# EAGLE board patch (EAGLE 7.2.0)
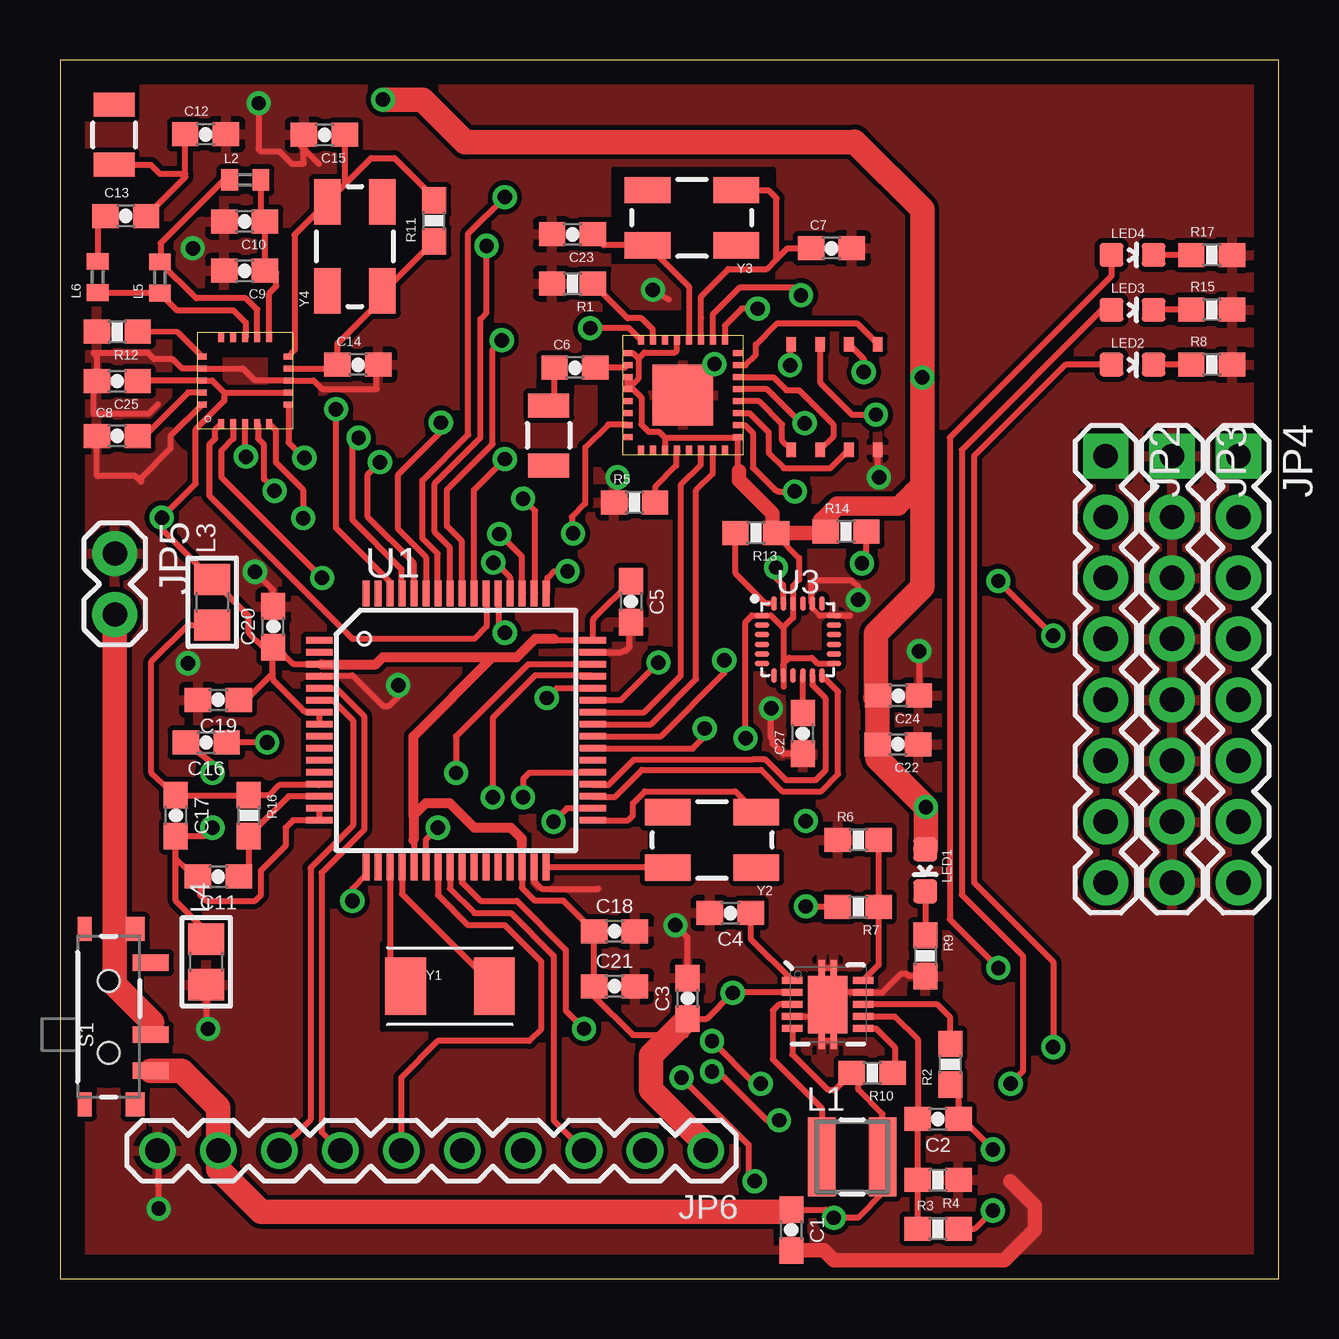
[diagram p0: board, top side]
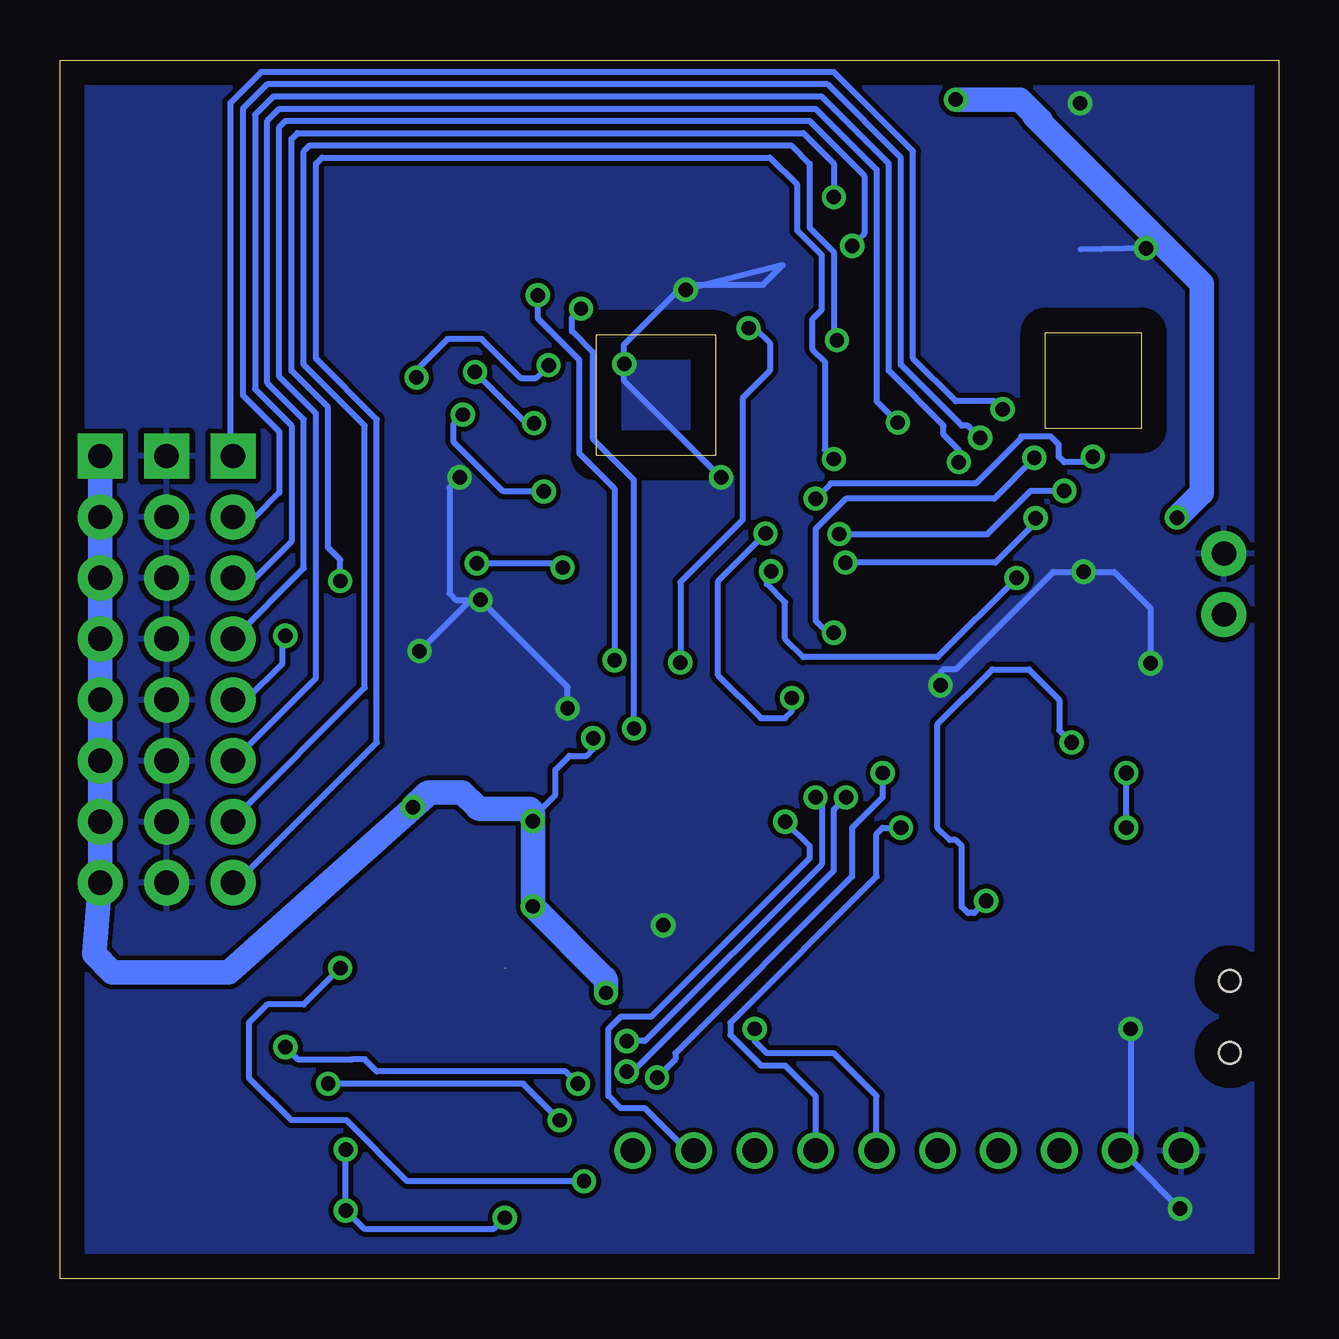
[diagram p1: board, bottom side, seen from below]

Size 50.8 x 50.8 mm. Coordinates in mm from the lower left corner, seen from the top.
Outline: 0,0 50.8,0 50.8,50.8 0,50.8 0,0
Copper layers (1*16): Top 0.035mm / dielectric 1.5mm / Bottom 0.035mm
Design rules "default": minimum track width 10mil, minimum drill 24mil, track to track 8mil, track to pad 8mil, pad to pad 8mil, via to via 8mil, smd to smd 8mil, copper to edge 40mil, drill to drill 8mil, minimum pad ring 10mil, minimum via ring 8mil, stop-mask expansion 4mil, vias tented up to drill 0mil, thermal gap 10mil
Net classes: 1 USB: width 0.254 mm, drill 0.33 mm, clearance 0.159 mm; 2 Top GND Pour: clearance 0.762 mm to class 1
tRestrict: area 13.5,10.4 to 19.1,14; area 31.2,10.2 to 32.8,12.7; area 24.6,16.8 to 29.7,20.1; area 23.1,42.4 to 29.7,46.2

## Footprints (pad centres in the part's own frame; a part is rotated, then mirrored left to right if it is on the bottom)
0603-CAP = smd 1.1 x 1: 1 -0.85,0; 2 0.85,0
1X08 = drill 1.016 pad 1.88 square: 1 0,0 | drill 1.016 pad 1.88: 2 2.54,0; 3 5.08,0; 4 7.62,0; 5 10.16,0; 6 12.7,0; 7 15.24,0; 8 17.78,0
1X02 = drill 1.016 pad 1.88: 1 0,0; 2 2.54,0
1X10 = drill 1.016: 1 -11.43,0; 2 -8.89,0; 3 -6.35,0; 4 -3.81,0; 5 -1.27,0; 6 1.27,0; 7 3.81,0; 8 6.35,0; 9 8.89,0; 10 11.43,0
LPS3015 = smd 1.14 x 3.3: 1 -1.27,0; 2 1.27,0
C0402 = smd 0.7 x 0.9: 1 -0.65,0; 2 0.65,0
0805 = smd 1.3 x 1.5: 1 -0.95,0; 2 0.95,0
LED-0603 = smd 1 x 1: A 0,-0.877; C 0,0.877
0603-RES = smd 1.1 x 1: 1 -0.85,0; 2 0.85,0
SWITCH-SPST-SMD-A = smd 0.7 x 1.5: 1 -2.25,-1.75; 2 -0.75,-1.75; 3 2.25,-1.75 | smd 1 x 0.6: GND1 -3.65,1; GND3 3.65,1 | smd 1 x 0.8: GND2 -3.65,-1.1; GND4 3.65,-1.1 | hole 0.9: -1.5,0; 1.5,0
MK20DX256VLH7 = smd 1.1 x 0.285: 1 -5.7,3.75; 2 -5.7,3.25; 3 -5.7,2.75; 4 -5.7,2.25; 5 -5.7,1.75; 6 -5.7,1.25; 7 -5.7,0.75; 8 -5.7,0.25; 9 -5.7,-0.25; 10 -5.7,-0.75; 11 -5.7,-1.25; 12 -5.7,-1.75; 13 -5.7,-2.25; 14 -5.7,-2.75; 15 -5.7,-3.25; 16 -5.7,-3.75; 33 5.7,-3.75; 34 5.7,-3.25; 35 5.7,-2.75; 36 5.7,-2.25; 37 5.7,-1.75; 38 5.7,-1.25; 39 5.7,-0.75; 40 5.7,-0.25; 41 5.7,0.25; 42 5.7,0.75; 43 5.7,1.25; 44 5.7,1.75; 45 5.7,2.25; 46 5.7,2.75; 47 5.7,3.25; 48 5.7,3.75 | smd 0.285 x 1.1: 17 -3.75,-5.7; 18 -3.25,-5.7; 19 -2.75,-5.7; 20 -2.25,-5.7; 21 -1.75,-5.7; 22 -1.25,-5.7; 23 -0.75,-5.7; 24 -0.25,-5.7; 25 0.25,-5.7; 26 0.75,-5.7; 27 1.25,-5.7; 28 1.75,-5.7; 29 2.25,-5.7; 30 2.75,-5.7; 31 3.25,-5.7; 32 3.75,-5.7; 49 3.75,5.7; 50 3.25,5.7; 51 2.75,5.7; 52 2.25,5.7; 53 1.75,5.7; 54 1.25,5.7; 55 0.75,5.7; 56 0.25,5.7; 57 -0.25,5.7; 58 -0.75,5.7; 59 -1.25,5.7; 60 -1.75,5.7; 61 -2.25,5.7; 62 -2.75,5.7; 63 -3.25,5.7; 64 -3.75,5.7
QFN-10_PAD = smd 0.297 x 0.85: 1 -1,-1.475; 2 -0.5,-1.475; 3 0,-1.475; 4 0.5,-1.475; 5 1,-1.475; 6 1,1.475; 7 0.5,1.475; 8 0,1.475; 9 -0.5,1.475; 10 -1,1.475 | smd 0.7 x 0.28: 11 -1.5,0.25; 12 -1.5,-0.25; 13 1.5,0.25; 14 1.5,-0.25 | smd 2.4 x 1.65: 15 0,0
QFN-24/3MM = smd 0.6 x 0.23: 1 -1.5,1; 2 -1.5,0.6; 3 -1.5,0.2; 4 -1.5,-0.2; 5 -1.5,-0.6; 6 -1.5,-1; 13 1.5,-1; 14 1.5,-0.6; 15 1.5,-0.2; 16 1.5,0.2; 17 1.5,0.6; 18 1.5,1 | smd 0.23 x 0.6: 7 -1,-1.5; 8 -0.6,-1.5; 9 -0.2,-1.5; 10 0.2,-1.5; 11 0.6,-1.5; 12 1,-1.5; 19 1,1.5; 20 0.6,1.5; 21 0.2,1.5; 22 -0.2,1.5; 23 -0.6,1.5; 24 -1,1.5
ANTENNA-CHIP2 = smd 1.7 x 1: FEED 0,1.25; P$2 0,-1.25
SOP8 = smd 0.6 x 0.4: 1 -2.2,1.8; 2 -2.2,0.6; 3 -2.2,-0.6; 4 -2.2,-1.8; 5 2.2,-1.8; 6 2.2,-0.6; 7 2.2,0.6; 8 2.2,1.8
QFN20(4X4) = smd 0.4 x 0.25: 1 -1.8,1; 2 -1.8,0.5; 3 -1.8,0; 4 -1.8,-0.5; 5 -1.8,-1; 11 1.8,-1; 12 1.8,-0.5; 13 1.8,0; 14 1.8,0.5; 15 1.8,1 | smd 0.25 x 0.4: 6 -1,-1.8; 7 -0.5,-1.8; 8 0,-1.8; 9 0.5,-1.8; 10 1,-1.8; 16 1,1.8; 17 0.5,1.8; 18 0,1.8; 19 -0.5,1.8; 20 -1,1.8
QFN32 = smd 0.4 x 0.25: CHIP_EN/7 -2.3,-1.25; DVDD/24 2.3,1.75; LNA/2 -2.3,1.25; SD_CLK/21 2.3,0.25; SD_CMD/20 2.3,-0.25; SD_DATA_0/22 2.3,0.75; SD_DATA_1/23 2.3,1.25; SD_DATA_2/18 2.3,-1.25; SD_DATA_3/19 2.3,-0.75; TOUT/6 -2.3,-0.75; VDD3P3/3 -2.3,0.75; VDD3P3/4 -2.3,0.25; VDD_RTC/5 -2.3,-0.25; VDDA/1 -2.3,1.75; VDDPST/17 2.3,-1.75; XPD_DCDC/8 -2.3,-1.75 | smd 0.25 x 0.4: EXT_RSTB/32 -1.75,2.3; GPIO0/15 1.25,-2.3; GPIO2/14 0.75,-2.3; MTCK/12 -0.25,-2.3; MTDI/10 -1.25,-2.3; MTDO/13 0.25,-2.3; MTMS/9 -1.75,-2.3; RES12K/31 -1.25,2.3; U0RXD/25 1.75,2.3; U0TXD/26 1.25,2.3; VDD/16 1.75,-2.3; VDDA/30 -0.75,2.3; VDDD/29 -0.25,2.3; VDDPST/11 -0.75,-2.3; XTAL_IN/28 0.25,2.3; XTAL_OUT/27 0.75,2.3 | smd 2.54 x 2.54: GND 0,0
CRYSTAL-TXC-7A = smd 1.7 x 2.4: P$1 1.85,0; P$2 -1.85,0
CRYSTAL-SMD-5X3 = smd 1.9 x 1.1: 1 -1.85,-1.15; 2 1.85,-1.15; 3 1.85,1.15; 4 -1.85,1.15

## Placement (x,y rotation side)
C1  10uF  [0603-CAP]  30.48,2.03 270 top
C2  0.1uF  [0603-CAP]  36.6,6.65 180 top
C3  22uF  [0603-CAP]  26.16,11.68 90 top
C4  0.1uF  [0603-CAP]  27.94,15.24 180 top
C5  0.1uF  [0603-CAP]  23.8,28.22 270 top
C6  5.6 pF  [0603-CAP]  21.46,37.97 0 top
C7  15 pF  [0603-CAP]  32.16,42.95 0 top
C8  33 nF  [0603-CAP]  2.39,35.13 0 top
C9  2.2 nF  [0603-CAP]  7.7,42.01 180 top
C10  4.7 pF  [0603-CAP]  7.7,44.07 180 top
C11  0.1uF  [0603-CAP]  6.6,16.76 180 top
C12  1.0 pF  [0603-CAP]  6.07,47.7 0 top
C13  1.5 pF  [0603-CAP]  2.74,44.3 0 top
C14  22 pF  [0603-CAP]  12.42,38.1 0 top
C15  22 pF  [0603-CAP]  11.02,47.68 180 top
C16  0.1uF  [0603-CAP]  6.1,22.35 180 top
C17  2.2uF  [0603-CAP]  4.83,19.3 270 top
C18  0.1uF  [0603-CAP]  23.11,14.48 0 top
C19  0.1uF  [0603-CAP]  6.6,24.13 180 top
C20  2.2uF  [0603-CAP]  8.89,27.18 90 top
C21  0.1uF  [0603-CAP]  23.11,12.19 0 top
C22  1 uF  [0603-CAP]  34.92,22.28 180 top
C23  15 pF  [0603-CAP]  21.36,43.54 180 top
C24  .1 uF  [0603-CAP]  34.95,24.31 180 top
C25  .1 uF  [0603-CAP]  2.39,37.41 180 top
C27  .1 uF  [0603-CAP]  30.96,22.73 90 top
JP2  [1X08]  43.59,34.29 270 top
JP3  [1X08]  46.35,34.29 270 top
JP4  [1X08]  49.12,34.29 270 top
JP5  [1X02]  2.29,30.23 270 top
JP6  M100.1  [1X10]  15.49,5.33 180 top
L1  2.2uH, 2.1A  [LPS3015]  33.02,5.08 0 top
L2  2.7 nH  [C0402]  7.72,45.8 0 top
L3  600 Ohm/100 Mhz  [0805]  6.35,28.19 90 top
L4  600 Ohm/100 Mhz  [0805]  6.1,13.21 90 top
L5  8.2 nH  [C0402]  4.17,41.73 90 top
L6  3.9 nH  [C0402]  1.57,41.76 90 top
LED1  [LED-0603]  36.07,17.02 180 top
LED2  [LED-0603]  44.7,38.1 270 top
LED3  [LED-0603]  44.7,40.39 270 top
LED4  [LED-0603]  44.7,42.67 270 top
R1  12k  [0603-RES]  21.36,41.48 180 top
R2  10K  [0603-RES]  37.11,8.94 90 top
R3  2M  [0603-RES]  36.6,2.08 0 top
R4  220K  [0603-RES]  36.6,4.11 180 top
R5  12k  [0603-RES]  23.95,32.36 0 top
R6  220K  [0603-RES]  33.27,18.29 0 top
R7  1.2M  [0603-RES]  33.27,15.49 180 top
R8  330  [0603-RES]  48.01,38.1 0 top
R9  470  [0603-RES]  36.07,13.46 270 top
R10  1K  [0603-RES]  33.86,8.59 180 top
R11  1M  [0603-RES]  15.6,44.09 90 top
R12  22k  [0603-RES]  2.39,39.47 180 top
R13  10k  [0603-RES]  29.01,31.09 180 top
R14  10k  [0603-RES]  32.77,31.14 0 top
R15  330  [0603-RES]  48.01,40.39 0 top
R16  470  [0603-RES]  7.87,19.3 270 top
R17  330  [0603-RES]  48.01,42.67 0 top
S1  [SWITCH-SPST-SMD-A]  2.03,10.92 90 top
U1  MK20DX256VLH7  [MK20DX256VLH7]  16.51,22.86 0 top
U2  TPS61200  [QFN-10_PAD]  32,11.43 270 top
U3  MPU-9250  [QFN-24/3MM]  30.76,26.64 0 top
U$1  ANTENNA2SMD  [ANTENNA-CHIP2]  20.37,35.15 0 top
U$2  ANTENNA2SMD  [ANTENNA-CHIP2]  2.26,47.68 180 top
U$3  25Q40  [SOP8]  32.28,36.75 90 top
U$4  NRF24L01  [QFN20(4X4)]  7.72,37.44 90 top
U$6  ESP8266EX  [QFN32]  25.96,36.83 0 top
Y1  32.768KHz  [CRYSTAL-TXC-7A]  16.26,12.19 0 top
Y2  16Mhz/8pF  [CRYSTAL-SMD-5X3]  27.18,18.29 180 top
Y3  26 Mhz  [CRYSTAL-SMD-5X3]  26.34,44.22 180 top
Y4  16 Mhz  [CRYSTAL-SMD-5X3]  12.29,43.03 90 top

## Library data of the parts
C1 = appfruits; MF: Murata; MPN: GRM188R60J106ME47D
C2 C4 C5 C11 C16 C18 C19 C21 = appfruits; MF: Kemet; MPN: C0603C104J3RACTU
C3 = appfruits; MF: Murata; MPN: GRM188R60J226MEA0D
C6-C10 C12-C15 C22-C25 C27 = SparkFun-Capacitors
C17 C20 = appfruits; MF: Kemet; MPN: C0603C225K4PACTU
JP2-JP4 = SparkFun-Connectors; PROD_ID: CONN-08438
JP5 = SparkFun-Connectors
JP6 = umich
L1 = appfruits; MF: Coilcraft; MPN: LPS3015-222MRB
L2 L5 L6 = SparkFun-Passives
L3 L4 = appfruits; MF: Taiyo Yuden; MPN: BK2125HM601-T
LED1-LED4 = appfruits; MF: Avago; MPN: HSMG-C190
R1 R5 R11-R14 = SparkFun-Resistors
R2 = appfruits; MF: Panasonic; MPN: ERJ-3GEYJ103V
R3 = appfruits; MF: Panasonic; MPN: ERJ-3GEYJ205V
R4 R6 = appfruits; MF: Panasonic; MPN: ERJ-3GEYJ224V
R7 = appfruits; MF: Panasonic; MPN: ERJ-3GEYJ125V
R8 R9 R15-R17 = appfruits; MF: Panasonic; MPN: ERJ-3GEYJ471V
R10 = appfruits; MF: Panasonic; MPN: ERJ-3GEYJ102V
S1 = SparkFun-Electromechanical
U1 = appfruits; MF: Freescale; MPN: MK20DX256VLH7
U2 = appfruits; MF: Texas Instruments; MPN: TPS61200DRCR; PROD_ID: IC-10035
U3 = chips; DIGIKEY: 1428-1019-1-ND
U$1 U$2 = SparkFun-RF
U$3 U$6 = wifi
U$4 = RF
Y1 = appfruits; MF: Epson Timing; MPN: FC-255 32.7680K-A3
Y2 = appfruits; MF: ECS; MPN: ECS-160-8-30B-CKM
Y3 Y4 = SparkFun-FreqCtrl; PROD_ID: XTAL-08218

## Nets
3.3V: C3.1 C5.1 C18.1 C19.1 C20.1 C21.1 C22.2 C24.2 C25.1 JP4.1 JP4.2 JP4.3 JP4.4 JP4.5 JP4.6 JP4.7 JP4.8 JP6.1 L3.2 LED1.A R7.2 R13.1 R14.1 U1.3 U1.7 U1.8 U1.21 U1.30 U1.48 U2.2 U3.1 U3.8 U3.13 U3.22 U$3.8 U$4.7 U$4.18 U$6.VDD3P3/3 U$6.VDD3P3/4 U$6.VDDA/1 U$6.VDDD/29 U$6.VDDPST/11 U$6.VDDPST/17
A12: U1.11
A13: U1.12
DAC/A14: U1.18
FB: R6.2 R7.1 U2.10
GND [Top GND Pour]: C1.2 C3.2 C4.2 C5.2 C7.2 C8.1 C9.2 C10.2 C12.2 C14.2 C15.2 C18.2 C19.2 C20.2 C21.2 C22.1 C23.2 C24.1 C25.2 C27.1 JP3.1 JP3.2 JP3.3 JP3.4 JP3.5 JP3.6 JP3.7 JP3.8 JP5.1 JP6.10 L4.1 R1.2 R4.1 R5.1 R6.1 R8.2 R9.2 R12.2 R15.2 R17.2 U1.4 U1.31 U1.47 U2.4 U2.9 U2.11 U2.12 U2.13 U2.14 U2.15 U3.18 U3.20 U$3.4 U$4.8 U$4.17 U$4.20 U$6.GND
ID: JP6.6 U1.23
N$1: LED1.C R9.1
N$2: L1.1 U2.3
N$7: LED2.C R8.1
N$8: LED3.C R15.1
N$9: LED4.C R17.1
N$13: C6.2 U$6.LNA/2
N$16: C6.1 U$1.FEED
N$17: C14.1 R11.1 U$4.9 Y4.1
N$18: C15.1 R11.2 U$4.10 Y4.3
N$19: C9.1 C10.1 L2.2 U$4.11
N$20: L5.1 L6.1 U$4.13
N$21: C8.2 U$4.19
N$23: L2.1 L5.2 U$4.12
N$24: R12.1 U$4.16
N$25: C13.1 L6.2
N$26: C12.1 C13.2 U$2.FEED
N$27: U1.32 Y2.3
N$28: U1.33 Y2.1
N$29: U1.19 Y1.P$2
N$30: U1.20 Y1.P$1
N$32: R5.2 U$6.MTCK/12
N$34: C27.2 U3.10
N$38: R1.1 U$6.RES12K/31
PS: R2.2 U2.8
PTA2: JP6.3 U1.24
PTA4: U1.26
PTA5: U1.27
PTA12: U1.28
PTA13: U1.29
PTB0: U1.35 U3.12
PTB1: U1.36 U3.11
PTB2: LED2.A U1.37
PTB3: U1.38
PTB16: U1.39 U$6.U0RXD/25
PTB17: U1.40 U$6.U0TXD/26
PTB18: U1.41 U$6.GPIO0/15
PTB19: U1.42 U$6.GPIO2/14
PTC0: U1.43 U$6.EXT_RSTB/32
PTC1: U1.44 U$6.CHIP_EN/7
PTC2: LED3.A U1.45
PTC3: LED4.A U1.46
PTC4: U1.49 U$4.2
PTC5: U1.50 U$4.3
PTC6: U1.51 U$4.4
PTC7: U1.52 U$4.5
PTC8: U1.53 U$4.6
PTC9: U1.54 U$4.1
PTC10: JP2.8 U1.55
PTC11: JP2.7 U1.56
PTD0: JP2.6 U1.57
PTD1: JP2.5 U1.58
PTD2: JP2.4 U1.59
PTD3: JP2.3 U1.60
PTD4: JP2.2 U1.61
PTD5: JP2.1 U1.62
PTD6: U1.63
PTD7: U1.64
PTE0: U1.1
PTE1: U1.2
RESET_B: JP6.2 U1.34
RTC: U$6.VDD_RTC/5
SCL: R14.2 U3.23
SD-CLK: U$3.6 U$6.SD_CLK/21
SD-CMD: U$3.1 U$6.SD_CMD/20
SD-D0: U$3.2 U$6.SD_DATA_0/22
SD-D1: U$3.5 U$6.SD_DATA_1/23
SD-D2: U$3.7 U$6.SD_DATA_2/18
SD-D3: U$3.3 U$6.SD_DATA_3/19
SDA: R13.2 U3.24
SOFTPOWER: R10.1 U2.6
SWD_CLK: JP6.4 U1.22
SWD_DIO: JP6.5 U1.25
TOUT: U$6.TOUT/6
USB_D_N [USB]: JP6.8 U1.6
USB_D_P [USB]: JP6.7 U1.5
UVLO: C2.2 R3.1 R4.2 U2.7
VAUX: C4.1 U2.1
VCC: C1.1 C2.1 JP6.9 L1.2 R2.1 R3.2 R10.2 S1.1 U2.5
VDD: U$6.VDDA/30
VDDA: C17.1 L3.1 R16.1 U1.13
VRAW [Top GND Pour]: JP5.2 S1.2
VREF_OUT: C16.1 U1.17
VREFH: C11.1 R16.2 U1.14
VREFL: C11.2 C16.2 C17.2 L4.2 U1.15 U1.16
XTAL_IN: C23.1 U$6.XTAL_IN/28 Y3.3
XTAL_OUT: C7.1 U$6.XTAL_OUT/27 Y3.1

## Tracks (layer width: path | path; a pad name or v marks a point on that pad's centre or on a via)
3.3V  (via drill 0.6)
  Top 0.178: 6.85,36.94 6.85,36.8
  Top 0.254: C20.1 8.98,26.33 arc-45 9.06,26.29 9.73,25.63 10.77,25.63 arc-45 U1.3 10.77,25.65 arc45 10.89,25.6 | C20.1 8.47,26.33 7.87,26.92 7.87,27.62 L3.2 4.24,31.25 v4.24,31.73 5.66,33.15 5.66,35.41 6.85,36.59 6.85,36.8 | C25.1 3.26,37.44 U$4.18 6.35,37.44 6.85,36.94 U$4.7 | U$6.VDDA/1 23.88,38.58 24.11,38.35 | 24.11,38.35 24.11,37.53 U$6.VDD3P3/4 | U$6.VDD3P3/4 U$6.VDD3P3/3 | 24.11,38.35 24.36,38.61 25.63,38.61 25.71,38.69 U$6.VDDD/29 | U$6.VDD3P3/4 23.88,37.08 24.23,36.73 24.23,35.61 24.54,35.31 24.97,35.31 25.22,35.05 | 25.22,35.05 25.22,34.54 U$6.VDDPST/11 | 25.22,35.05 28.23,35.05 U$6.VDDPST/17 28.26,33.69 28.3,33.66 | C5.1 22.28,27.55 arc45 22.21,27.37 U1.48 arc-45 22.17,26.59 20.65,26.59 20.57,26.67 | 27.95,11.86 arc-45 28.12,11.93 U2.2 28.08,11.93 arc45 v28.04,11.91 26.96,10.83 C3.1 26.07,10.16 23.88,10.16 22.26,11.77 C21.1 C18.1 20.99,15.75 19.81,15.75 19.26,16.3 U1.30 19.26,18.08 | R7.2 31.15,15.49 arc-45 v31.09,15.52 | U1.21 arc45 14.78,17.21 14.78,18.24 14.73,18.29 | U1.8 arc45 10.82,23.14 10.82,23.59 arc45 U1.7 10.33,23.61 arc-45 10.15,23.68 8.94,24.89 arc-45 8.87,25.07 8.87,25.22 | C19.1 7.67,24.13 arc45 7.85,24.2 8.87,25.22 | 8.87,25.22 8.87,26.27 arc-45 C20.1 | 30.16,27.12 29.63,27.64 U3.1 28.84,27.64 28.57,27.38 v28.57,22.53 | 30.16,27.12 U3.8 | U3.8 30.16,25.64 30.4,25.88 31.34,25.88 31.58,25.64 U3.13 | U3.22 | U3.22 30.56,27.56 30.16,27.16 30.16,27.12 | R14.1 31.86,31.09 | R13.1 29.86,31 30.81,30.05 30.81,29.13 30.56,28.88 U3.22 | U3.8 30.16,24.67 | U$3.8 30.43,38.9 v30.43,38.08 | 34.01,24.23 34.09,24.31 C24.2
  Top 0.406: 20.57,26.67 19.81,26.67 19.05,25.91 18.03,25.91 | 19.26,18.08 19.26,18.33 18.8,18.8 17.27,18.8 16.26,19.81 15.24,19.81 14.73,19.3 | 10.89,25.6 13.16,25.6 13.46,25.91 18.03,25.91 | 14.73,19.3 14.73,18.29 | 14.73,19.3 14.73,22.61 18.03,25.91
  Top 0.61: 31.86,31.09 R13.1 29.69,31.25 29.69,31.9 28.3,33.3 28.3,33.66
  Top 1.016: LED1.A arc45 36.09,17.96 v36.09,19.66 34.08,21.68 C22.2 34.08,24.28 C24.2 | 33.98,24.23 34.01,24.23 34.01,26.9 35.94,28.83 v35.94,37.57 35.94,44.58 33.12,47.4 33.1,47.37 16.89,47.37 15.11,49.15 v13.46,49.15 | JP6.1 26.92,5.59 24.64,7.87 24.64,9.31 C3.1
  Bottom 0.254: v30.43,38.08 30.96,37.54 31.6,37.54 33.22,39.17 34.65,39.17 35.94,37.87 v35.94,37.57 | v28.57,22.53 28.57,22.07 28.85,21.79 29.57,21.79 30.15,21.21 30.15,20.17 31.17,19.15 v31.09,19.07
  Bottom 1.016: JP4.1 JP4.2 JP4.3 JP4.4 JP4.5 JP4.6 JP4.7 JP4.8 49.38,13.54 48.62,12.78 43.76,12.78 35.38,20.27 | 35.38,20.27 34.04,20.27 33.42,19.66 arc-45 33.24,19.58 31.22,19.58 31.16,19.53 arc45 31.09,19.35 v31.09,19.07 v31.09,15.52 28.12,12.55 arc45 28.04,12.37 v28.04,11.91 | 35.38,20.27 arc-45 35.56,20.2 v36.09,19.66 | 3.2,32.77 v4.24,31.73 | v13.46,49.15 10.79,49.15 9.91,48.26
  other vias: 49.12,16.51
FB
  Top 0.254: R6.2 R7.1 34.12,13.07 U2.10
GND  (via drill 0.6, 0.61)  (1 unrouted)
  Top 0.178: 31.67,27.64 31.36,27.95
  Top 0.254: 31.62,11.05 31.5,10.92 U2.4 32,10.93 32,10.92 U2.15 | 32.25,10.41 U2.13 U2.14 | 32.25,10.41 32.26,10.41 | 32.25,10.41 32.25,10.42 31.62,11.05 | U2.11 U2.12 | 32.52,11.93 U2.9 34.28,11.93 35.05,12.7 35.31,12.7 35.39,12.61 R9.2 | 32.52,11.93 32.26,12.19 32.26,12.95 | U1.31 19.76,16.56 20.07,16.26 22.44,16.26 | 31.62,11.05 U2.15 | U1.4 10.85,25.15 12.19,25.15 13.46,23.88 13.72,23.88 14.1,24.26 v14.1,24.74 | C20.2 8.64,28.28 8.8,28.28 8.89,28.19 8.89,28.7 v8.13,29.46 8.38,29.21 | L4.1 6.1,10.49 v6.17,10.41 | v4.12,2.92 4.12,5.28 JP6.10 | 4.08,36.44 3.68,36.04 1.4,36.04 1.4,37.27 C25.2 1.54,38.44 1.4,38.58 3.68,38.58 3.94,38.33 4.7,38.33 5.09,37.94 U$4.17 7.63,37.94 8.13,37.44 U$4.8 10.57,37.44 10.92,37.08 13.21,37.08 13.21,38.04 C14.2 | C10.2 7.34,44.27 | 10.79,46.46 9.78,47.47 | 25.96,36.75 U$6.GND 25.96,36.98 arc-45 26.03,37.16 v27.28,38.12 | U1.47 23.34,26.11 arc45 23.47,26.16 arc45 23.64,26.23 23.75,26.34 23.75,27.25 arc-45 C5.2 | v24.71,41.22 25.38,40.82 | R1.2 20.16,41.83 | 31.67,27.64 31.68,27.64 U3.18 32.93,27.64 32.94,27.64 | 31.36,27.95 U3.20 31.32,28.19 31.32,28.98 31.45,29.11 32.99,29.11 33.27,28.83 v33.27,28.3 | v34.14,33.4 34.08,33.45 U$3.4 | C27.1 30.15,21.87 29.72,22.3 29.72,22.48 29.64,22.55 v29.64,23.77 | U$4.20 4.6,35.12 4.6,34.59 3.38,33.38 3.38,33.22 3.15,33.45 1.57,33.45 1.54,33.49 C8.1 | R5.1 23.24,32.5 v23.24,33.4 | U2.15 32.02,11.43 32.52,11.93 | 26.16,11.94 26.16,14.22 v25.65,14.73 | C24.1 35.81,24.32 v35.81,26.16 | v8.28,49 8.28,47.09 8.38,46.99 9.14,46.99 9.65,46.48 10.16,46.48 10.16,47.75
  Top 0.61: C1.2 31.84,1.18 32.26,0.76 39.37,0.76 40.64,2.03 40.64,3.05 39.62,4.06
  Bottom 0.254: v5.33,25.65 5.33,27.94 6.86,29.46 v8.13,29.46 9.4,29.46 13.46,25.4 13.97,25.4 14.1,25.27 v14.1,24.74 | v6.17,10.41 6.17,4.98 v4.12,2.92 | v5.54,42.95 8.26,42.9 | v24.71,41.22 20.68,42.24 21.49,41.43 24.68,41.43 arc-45 24.86,41.35 27.28,38.94 v27.28,38.12 27.28,37.44 v23.24,33.4 | v34.14,33.4 34.57,32.97 34.57,28.57 34.29,28.3 v33.27,28.3 | v35.81,26.16 33.68,28.3 v33.27,28.3 | v29.64,23.77 29.64,24.66 v33.27,28.3
  pour Top: -22.35,85.6 68.07,85.6 68.07,-17.78 -22.35,-17.78
  pour Bottom: -10.16,73.15 73.15,72.64 73.15,-10.92 -10.16,-10.41
ID
  Top 0.254: U1.23 15.76,15.99 17.02,14.73 18.54,14.73 20.07,13.21 20.07,10.41 19.56,9.91 15.75,9.91 14.22,8.38 JP6.6
N$1
  Top 0.254: LED1.C R9.1
N$2
  Top 0.254: U2.3 29.97,11.43 29.72,11.18 29.72,9.14 31.75,7.11 L1.1
N$3
  Top 0.813: 31.77,31.17 31.77,31.57 32.41,32.21 34.95,32.21 35.18,32.44 35.53,32.79 35.89,33.15
N$4
  Bottom 1.016: 10.19,48.46 3.2,41.48 3.2,32.74
N$5
  Top 0.254: 23.75,37.47 23.75,37.34
N$7
  Top 0.254: R8.1 LED2.C
N$8
  Top 0.254: R15.1 LED3.C
N$9
  Top 0.254: R17.1 LED4.C
N$13
  Top 0.254: U$6.LNA/2 23.55,37.97 C6.2
N$16
  Top 0.254: U$1.FEED 20.61,36.65 C6.1
N$17
  Top 0.254: R11.1 13.53,41.18 Y4.1 13.44,40.85 11.57,38.98 C14.1 11.41,37.94 U$4.9
N$18
  Top 0.254: U$4.10 9.78,38.7 9.78,43.51 Y4.3 11.87,45.61 | C15.1 11.87,45.61 | 11.87,45.61 12.98,46.71 13.95,46.71 15.6,45.06 R11.2
N$19
  Top 0.254: U$4.11 8.72,41.08 9.02,41.38 9.02,41.92 C9.1 C10.1 8.37,44.24 L2.2
N$20
  Top 0.254: U$4.13 7.75,39.27 7.75,39.85 7.24,40.36 4.89,40.36 L5.1 1.6,41.08 L6.1
N$21
  Top 0.254: C8.2 3.53,35.13 5.34,36.94 U$4.19
N$23
  Top 0.254: U$4.12 8.22,40.39 7.75,40.87 5.68,40.87 L5.2 4.19,42.41 4.19,43.16 6.83,45.8 L2.1
N$24
  Top 0.254: U$4.16 4.92,39.45 R12.1
N$25
  Top 0.254: C13.1 1.65,44.05 arc45 1.57,43.87 L6.2
N$26
  Top 0.254: U$2.FEED 3.78,46.43 4.16,46.05 5.22,46.05 | C13.2 5.22,45.92 5.22,46.05 | 5.22,46.05 C12.1
N$27
  Top 0.254: 24.54,17.16 Y2.3 25.31,17.16 U1.32
N$28
  Top 0.254: U1.33 23.68,19.11 23.88,19.3 23.88,19.81 24.38,20.32 28.15,20.32 Y2.1
N$29
  Top 0.254: U1.19 13.76,12.84 Y1.P$2
N$30
  Top 0.254: U1.20 14.26,16.04 Y1.P$1
N$32
  Top 0.254: U$6.MTCK/12 25.74,34.49 25.68,34.43 25.68,33.88 24.8,33.01 R5.2
N$34
  Top 0.254: C27.2 U3.10
N$38
  Top 0.254: U$6.RES12K/31 24.71,39.55 24.23,40.03 23.66,40.03 R1.1
PS
  Top 0.254: U2.8 36.58,11.43 37.08,10.92 37.08,9.82 R2.2 37.11,10.21
PTA2
  Top 0.254: U1.24 16.26,16.25 17.27,15.24 18.8,15.24 20.57,13.46 20.57,6.6 JP6.3
PTB0
  Top 0.254: U1.35 22.23,20.09 23.14,20.09 24.26,21.21 29.23,21.21 30.12,20.32 31.73,20.32 32.44,21.03 32.44,24.47 U3.12
PTB1
  Top 0.254: U1.36 22.25,20.57 22.86,20.57 23.93,21.64 28.63,21.64 28.85,21.64 29.41,21.64 30.28,20.78 31.5,20.78 31.9,21.18 31.9,24.21 31.36,24.75 U3.11
PTB2  (via drill 0.6)
  Top 0.254: U1.37 22.18,21.08 19.56,21.08 19.3,20.83 v19.3,20.07 | LED2.A 41.91,38.1 38.1,34.29 38.1,16.51 41.4,13.21 v41.4,9.65 | v27.18,9.91 28.96,8.13 v29.21,8.13
  Bottom 0.254: v19.3,20.07 19.05,19.81 19.05,17.27 26.42,9.91 v27.18,9.91 | v29.21,8.13 29.72,8.64 37.59,8.64 38.1,9.14 38.61,9.14 40.89,9.14 v41.4,9.65
PTB16  (via drill 0.6)
  Top 0.254: U1.39 22.22,22.1 26.36,22.1 26.87,22.61 v26.87,22.94 | v29.08,40.44 28.42,40.44 27.71,39.72 U$6.U0RXD/25
  Bottom 0.254: v29.08,40.44 29.46,40.06 29.46,39.5 28.57,38.61 28.57,35 26.87,33.3 v26.87,22.94
PTB17  (via drill 0.6)
  Top 0.254: U1.40 25.04,22.61 27.69,25.25 v27.69,25.78 | U$6.U0TXD/26 27.23,39.15 27.23,40.21 28.35,41.33 30.56,41.33 v30.89,41
  Bottom 0.254: v30.89,41 30.89,40.03 29.16,38.3 29.16,34.42 27.69,32.94 v27.69,25.78
PTB18
  Top 0.254: U1.41 24.63,23.11 26.52,24.99 26.52,32.87 27.21,33.56 U$6.GPIO0/15
PTB19
  Top 0.254: U1.42 24.35,23.61 25.88,25.15 25.88,33.1 26.71,33.92 U$6.GPIO2/14
PTC0  (via drill 0.6)
  Top 0.254: U$6.EXT_RSTB/32 23.71,39.62 v22.1,39.62 | v24.94,25.68 23.37,24.11 U1.43
  Bottom 0.254: v24.94,25.68 24.94,29.03 22.35,31.62 22.35,36.7 21.21,37.85 21.21,38.99 21.84,39.62 v22.1,39.62
PTC1  (via drill 0.6)
  Top 0.254: U$6.CHIP_EN/7 23.63,35.61 22.86,35.61 21.89,34.65 21.89,32.31 21.34,31.75 21.34,31.11 v21.39,31.06 | U1.44 20.7,24.61 v20.3,24.21
  Bottom 0.254: v20.3,24.21 20.3,23.65 20.57,23.37 21.59,23.37 23.37,25.15 23.37,29.08 v21.39,31.06
PTC2  (via drill 0.6)
  Top 0.254: U1.45 22.17,25.15 19.81,25.15 18.03,23.37 v18.03,20.07 | LED3.A 43.43,40.39 37.59,34.54 37.59,16 40.13,13.46 40.13,8.64 v39.62,8.13 | v27.18,8.64 27.43,8.64 29.46,6.6 v29.97,6.6
  Bottom 0.254: v27.18,8.64 26.92,8.64 18.54,17.02 18.54,19.56 v18.03,20.07 | v29.97,6.6 31.5,8.13 v39.62,8.13
PTC3  (via drill 0.6)
  Top 0.254: LED4.A 43.83,41.8 37.08,35.05 37.08,14.99 v39.12,12.95 | v25.91,8.38 28.7,5.59 28.7,4.32 v28.96,4.06 | U1.46 19.51,25.61 16.51,22.61 v16.51,21.08
  Bottom 0.254: v16.51,21.08 16.51,20.07 17.78,18.8 17.78,16.76 25.15,9.4 25.15,9.14 v25.91,8.38 | v28.96,4.06 36.32,4.06 38.86,6.6 41.15,6.6 42.93,8.38 42.93,10.67 42.16,11.43 40.64,11.43 v39.12,12.95
PTC4  (via drill 0.6)
  Top 0.254: U$4.2 7.22,35.01 6.73,34.52 6.73,33.4 v10.92,29.21 | U1.49 20.32,28.62 20.32,29.21 20.6,29.49 v21.16,29.49
  Bottom 0.254: v10.92,29.21 14.22,25.91 19.81,25.91 20.57,26.67 20.57,28.19 21.34,28.96 21.34,29.31 v21.16,29.49
PTC5  (via drill 0.6)
  Top 0.254: U1.50 19.81,28.61 19.81,32 v19.3,32.51 | v7.75,34.27 7.72,34.29 U$4.3
  Bottom 0.254: v7.75,34.27 8,34.01 8.03,34.04 8.94,34.04 9.17,34.27 9.17,34.77 9.5,35.1 10.74,35.1 10.74,35.03 12.62,33.15 18.67,33.15 v19.3,32.51
PTC6  (via drill 0.6)
  Top 0.254: 19.3,28.6 U1.51 19.26,30.09 v18.31,31.04 | U$4.4 8.26,35.61 8.26,35.03 8.51,34.77 8.51,33.33 v8.94,32.84
  Bottom 0.254: v8.94,32.84 10.34,32.84 12.14,31.04 v18.31,31.04
PTC7  (via drill 0.6)
  Top 0.254: U1.52 18.76,29.25 18.16,29.84 v18.06,29.84 | U$4.5 8.99,35.37 8.99,34.04 10.13,32.89 v10.13,31.7
  Bottom 0.254: v18.06,29.84 11.81,29.84 10.13,31.52 v10.13,31.7
PTC8  (via drill 0.6)
  Top 0.254: U$4.6 9.52,34.85 v10.19,34.21 | U1.53 18.29,28.53 18.29,27.18 v18.54,26.92
  Bottom 0.254: v10.19,34.21 11.86,32.51 18.03,32.51 19.3,31.24 19.3,27.43 18.8,26.92 v18.54,26.92
PTC9
  Top 0.254: U1.54 17.78,28.54 17.78,27.18 17.27,26.67 12.19,26.67 6.22,32.64 6.22,34.77 6.48,35.03 6.48,35.4 U$4.1
PTC10  (via drill 0.6)
  Top 0.254: U1.55 17.26,32.88 v18.54,34.16
  Bottom 0.254: JP2.8 43.43,16.51 37.59,22.35 37.59,35.81 40.13,38.35 40.13,46.48 39.88,46.74 21.21,46.74 20.07,45.59 20.07,43.69 19.05,42.67 19.05,40.39 19.43,40.01 19.43,38.73 18.92,38.23 18.92,34.54 v18.54,34.16
PTC11  (via drill 0.6)
  Top 0.254: 16.76,29.29 U1.56 16.76,30.74 16.13,31.37 16.13,32.89 18.03,34.8 18.03,38.73 v18.41,39.12
  Bottom 0.254: v18.41,39.12 18.54,39.24 18.54,42.8 19.56,43.81 19.56,46.48 20.32,47.24 40.39,47.24 40.64,46.99 40.64,38.1 38.1,35.56 38.1,24.64 43.59,19.15 JP2.7
PTD0  (via drill 0.6)
  Top 0.254: 16.26,29.18 U1.57 16.26,30.48 15.62,31.11 15.62,33.15 17.53,35.05 17.53,40.01 17.78,40.26 v17.78,43.05
  Bottom 0.254: 17.53,43.31 v17.78,43.05 17.27,43.56 17.27,45.97 19.56,48.26 41.4,48.26 41.66,48.01 41.66,37.59 40.13,36.07 40.13,25.04 JP2.6
PTD1  (via drill 0.6)
  Top 0.254: 15.77,28.57 U1.58 15.75,28.57 15.75,30.23 15.11,30.86 15.11,33.27 17.02,35.18 17.02,43.56 v18.54,45.09 | v41.4,26.8 v39.12,29.08
  Bottom 0.254: JP2.5 43.05,24.13 41.53,25.65 41.53,26.67 v41.4,26.8 | v39.12,29.08 39.12,29.97 39.62,30.48 39.62,36.32 41.15,37.85 41.15,47.5 40.89,47.75 19.81,47.75 18.54,46.48 v18.54,45.09
PTD2  (via drill 0.6)
  Top 0.254: 15.24,28.58 U1.59 15.26,30.08 14.1,31.24 14.1,33.53 15.88,35.31 v15.88,35.69
  Bottom 0.254: JP2.4 40.64,29.62 40.64,35.81 42.16,37.34 42.16,48.26 41.66,48.77 19.3,48.77 16.76,46.23 16.76,36.58 v15.88,35.69
PTD3  (via drill 0.6)
  Top 0.254: U1.60 14.73,28.59 14.73,29.84 12.83,31.75 12.83,33.53 v13.34,34.04
  Bottom 0.254: v13.34,34.04 13.34,34.54 13.97,35.18 13.97,35.56 16.26,37.85 16.26,46.48 19.05,49.28 41.91,49.28 42.67,48.51 42.67,37.08 41.15,35.56 41.15,30.73 42.67,29.21 JP2.3
PTD4  (via drill 0.6)
  Top 0.254: U1.61 14.22,28.6 14.22,29.59 12.19,31.62 12.19,34.8 v12.45,35.05
  Bottom 0.254: v12.45,35.05 12.95,35.56 13.21,35.56 15.75,38.1 15.75,46.74 18.8,49.78 42.16,49.78 43.18,48.77 43.18,36.83 41.66,35.31 41.66,32.77 42.67,31.75 JP2.2
PTD5  (via drill 0.6)
  Top 0.254: U1.62 13.76,29.04 11.51,31.29 v11.51,36.25
  Bottom 0.254: JP2.1 43.69,34.39 43.69,49.02 42.42,50.29 18.54,50.29 15.24,46.99 15.24,38.35 13.46,36.58 11.84,36.58 v11.51,36.25
RESET_B  (via drill 0.6)
  Top 0.254: U1.34 21.13,19.61 v20.57,19.05
  Bottom 0.254: JP6.2 24.64,5.33 26.42,7.11 27.43,7.11 27.94,7.62 27.94,10.41 27.43,10.92 26.16,10.92 19.56,17.53 19.56,18.03 v20.57,19.05
SCL  (via drill 0.6)
  Top 0.254: U3.23 30.15,28.15 30.15,28.93 30.12,28.93 29.82,29.23 29.82,29.62 v29.84,29.64 | v33.43,29.82 33.62,30.01 R14.2
  Bottom 0.254: v29.84,29.64 30.02,29.82 v33.43,29.82
SD-CLK  (via drill 0.6)
  Top 0.254: U$3.6 33.5,38.34 v33.5,37.8 | v31.04,35.66 30.89,35.66 29.47,37.08 U$6.SD_CLK/21
  Bottom 0.254: v33.5,37.8 31.37,35.66 v31.04,35.66
SD-CMD
  Top 0.254: 28.28,36.6 U$6.SD_CMD/20 29.13,36.58 30.1,35.61 30.1,34.94 U$3.1 30.48,34.74
SD-D0
  Top 0.254: 31.67,34.56 U$3.2 32.23,35.1 32.23,35.61 30.81,37.03 30.28,37.03 29.73,37.58 U$6.SD_DATA_0/22
SD-D1
  Top 0.254: U$6.SD_DATA_1/23 28.58,38.08 29.01,38.51 29.01,38.94 29.9,39.83 33.21,39.83 U$3.5
SD-D2  (via drill 0.6)
  Top 0.254: U$6.SD_DATA_2/18 28.55,35.58 28.88,35.26 28.88,33.81 29.8,32.89 arc45 29.98,32.82 v30.63,32.82 | U$3.7 31.7,38.94 31.7,37.34 33.02,36.02 v34.01,36.02
  Bottom 0.254: v34.01,36.02 34.39,35.64 34.39,34.87 32.41,32.89 arc-45 32.23,32.82 v30.63,32.82
SD-D3
  Top 0.254: U$6.SD_DATA_3/19 28.74,36.08 29.54,35.28 29.54,34.42 30.18,33.78 32.11,33.78 U$3.3
SDA
  Top 0.254: U3.24 29.41,28.14 28.16,29.4 R13.2
SOFTPOWER
  Top 0.254: U2.6 34.02,10.43 34.8,9.65 34.8,8.68 R10.1
SWD_CLK  (via drill 0.61)
  Top 0.254: U1.22 15.26,18.31 v15.75,18.8
  Bottom 0.254: v15.75,18.8 16.51,18.8 16.76,18.54 16.76,16.76 22.86,10.67 22.86,10.16 21.59,8.89 20.57,8.89 19.3,7.62 JP6.4
SWD_DIO  (via drill 0.6)
  Top 0.254: U1.25 16.76,16.51 17.53,15.75 19.05,15.75 21.08,13.72 21.08,11.18 v21.84,10.41
  Bottom 0.254: v21.84,10.41 21.84,9.91 21.34,9.4 18.54,9.4 16.76,7.62 JP6.5
USB_D_N
  Top 0.254: U1.6 11.38,24.11 12.22,23.27 12.22,18.89 10.44,17.11 10.44,6.63 JP6.8
USB_D_P
  Top 0.254: U1.5 11.53,24.61 12.68,23.46 12.68,18.7 10.9,16.92 10.9,6.12 JP6.7
UVLO
  Top 0.254: R3.1 R4.2 C2.2 | 36.51,6.66 C2.2 | U2.7 34.79,10.93 35.75,9.97 C2.2
VAUX
  Top 0.254: C4.1 28.79,14.17 U2.1
VCC  (via drill 0.6)
  Top 0.254: U2.5 30.53,9.35 32,7.87 32.3,7.87 R10.2 33.27,8.32 33.27,7.87 34.29,6.86 L1.2 34.29,3.56 33.27,2.54 v32.26,2.54 31.92,2.88 C1.1 30.48,3.05 | R2.1 37.45,7.75 C2.1 37.62,6.66 v38.89,5.38 | R3.2 38.12,2.08 v38.89,2.85
  Top 1.016: C1.1 30.39,2.79 8.38,2.79 6.6,4.57 JP6.9 6.6,7.14 5.07,8.67 S1.1
  Bottom 0.254: v38.89,5.38 v38.89,2.85 38.12,2.08 32.72,2.08 v32.26,2.54
VDDA
  Top 0.254: U1.13 10.77,20.57 9.14,20.57 8.72,20.15 R16.1 C17.1 3.81,21.08 3.81,25.72 5.33,27.24 L3.1
VRAW
  Top 0.61: 3.83,10.69 3.83,10.22 S1.2
  Top 1.016: JP5.2 2.29,12.24 3.83,10.69
VREF_OUT  (via drill 0.61)
  Top 0.254: v8.64,22.35 C16.1 | U1.17 12.76,16.82 12.19,16.26 v12.19,15.75
  Bottom 0.254: v8.64,22.35 9.14,22.86 9.14,24.13 10.41,25.4 11.94,25.4 14.22,23.11 14.22,18.8 13.72,18.29 13.46,18.29 13.21,18.03 13.21,15.49 12.95,15.24 12.7,15.24 v12.19,15.75
VREFH
  Top 0.254: U1.14 9.53,20.11 R16.2 7.87,16.93 C11.1
VREFL  (via drill 0.61)
  Top 0.254: U1.15 U1.16 9.71,19.11 9.4,18.8 9.4,18.03 8.38,17.02 8.38,16 8.13,15.75 6.1,15.75 5.84,16 5.84,16.68 C11.2 5.33,16.93 5.33,17.02 | C17.2 6.01,18.45 v6.35,18.8 | v6.35,21.08 6.35,21.5 C16.2 | 5.33,17.02 4.83,17.53 C17.2 | 5.33,17.02 5.84,16.51 | 4.67,18.61 C17.2 | L4.2 6.1,14.48 4.83,15.75 C17.2
  Bottom 0.254: v6.35,18.8 v6.35,21.08
XTAL_IN
  Top 0.254: U$6.XTAL_IN/28 26.21,41.35 Y3.3 22.68,43.07 C23.1
XTAL_OUT
  Top 0.254: U$6.XTAL_OUT/27 26.71,40.04 26.72,40.06 26.72,40.95 27.86,42.09 29.46,42.09 29.87,42.49 | 29.87,42.49 29.87,45.03 29.53,45.37 Y3.1 | 29.87,42.49 30.33,42.95 C7.1